# Altium PCB PCB1.PcbDoc
Units mm, origin at the board's own origin, x right, y up, seen from the top; angles counter-clockwise.
Board outline 44 x 22 mm, 4 copper layers (Top Layer, Layer 1, Layer 2, Bottom Layer), stack 1.564 mm thick; 52 components, 43 nets, 175 pads, 173 vias.
Unrouted connection lines stored in the file: 9.
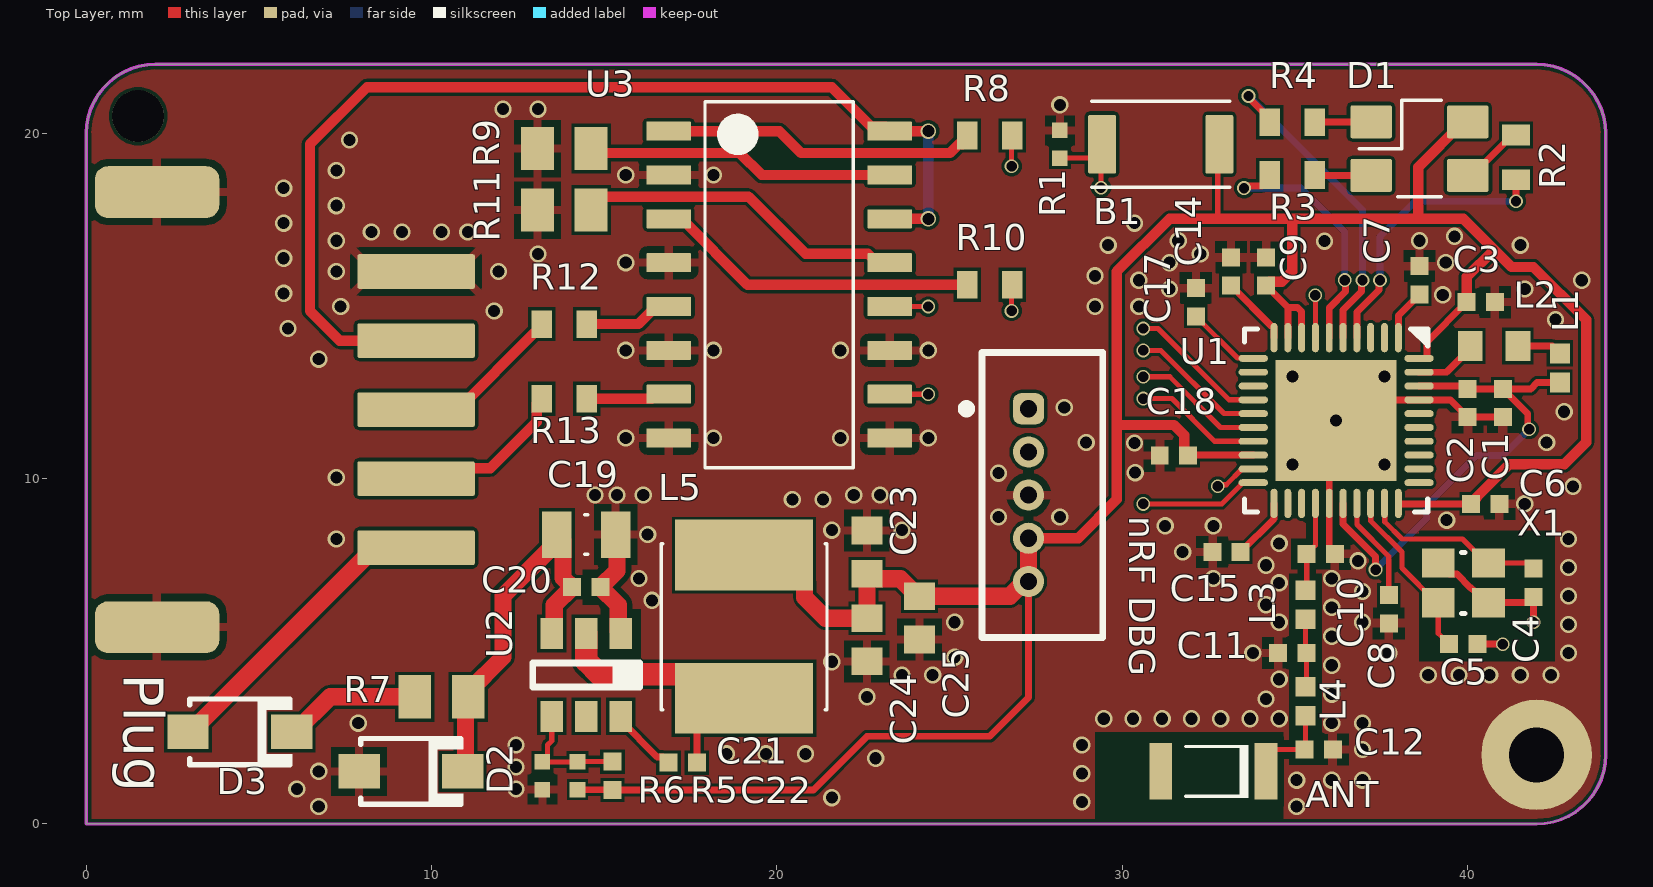
[diagram p0: Top Layer view]
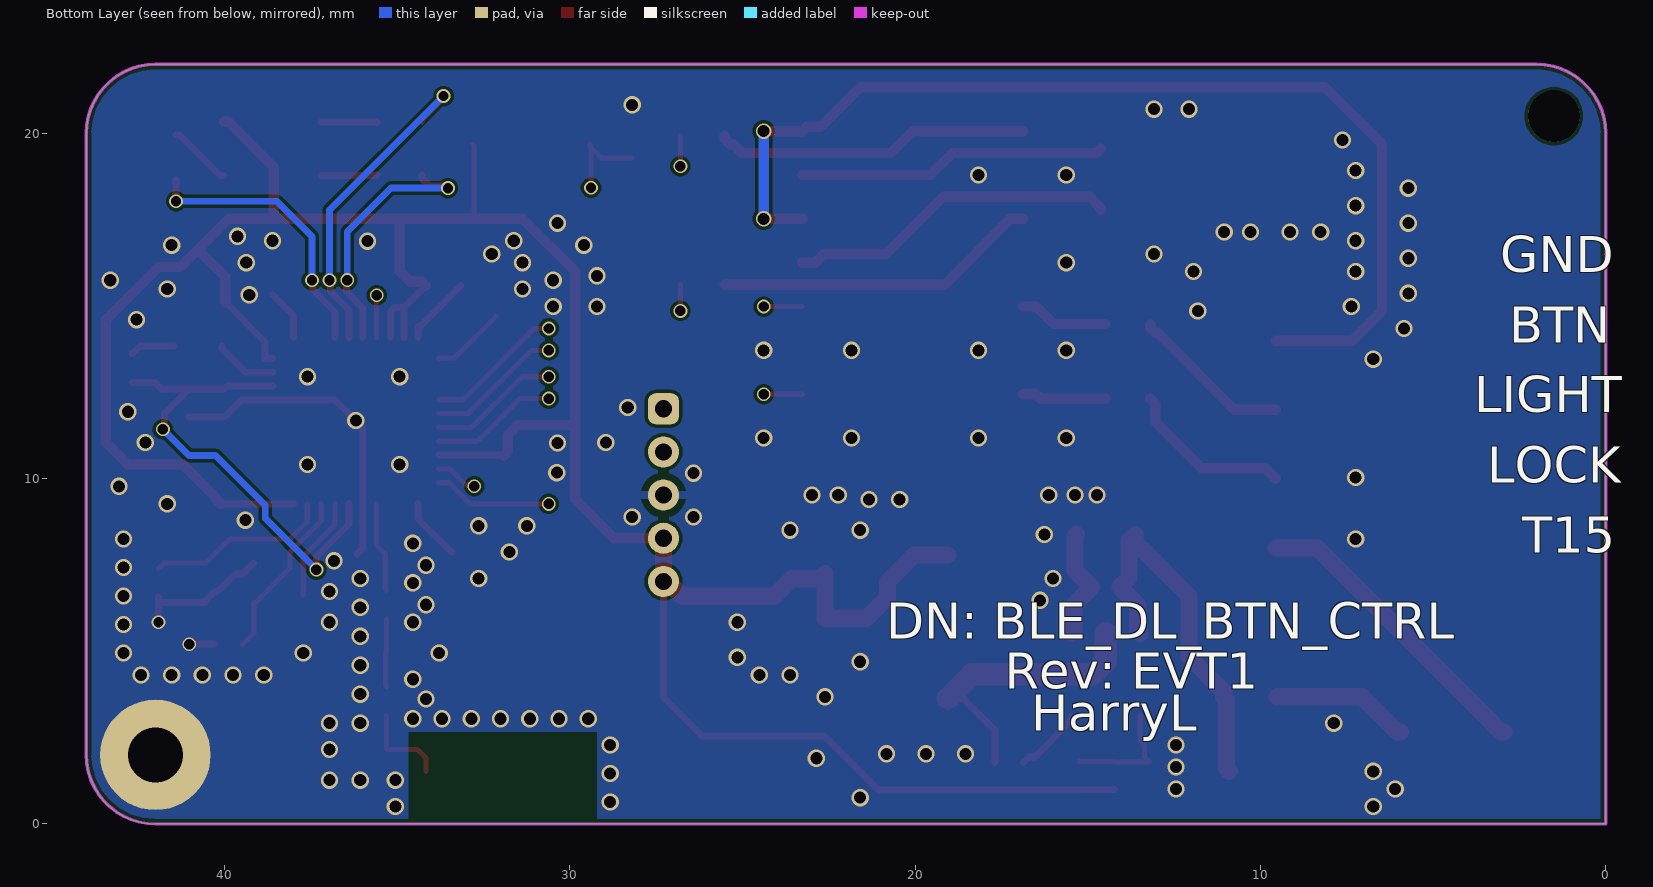
[diagram p1: Bottom Layer view, seen from below]
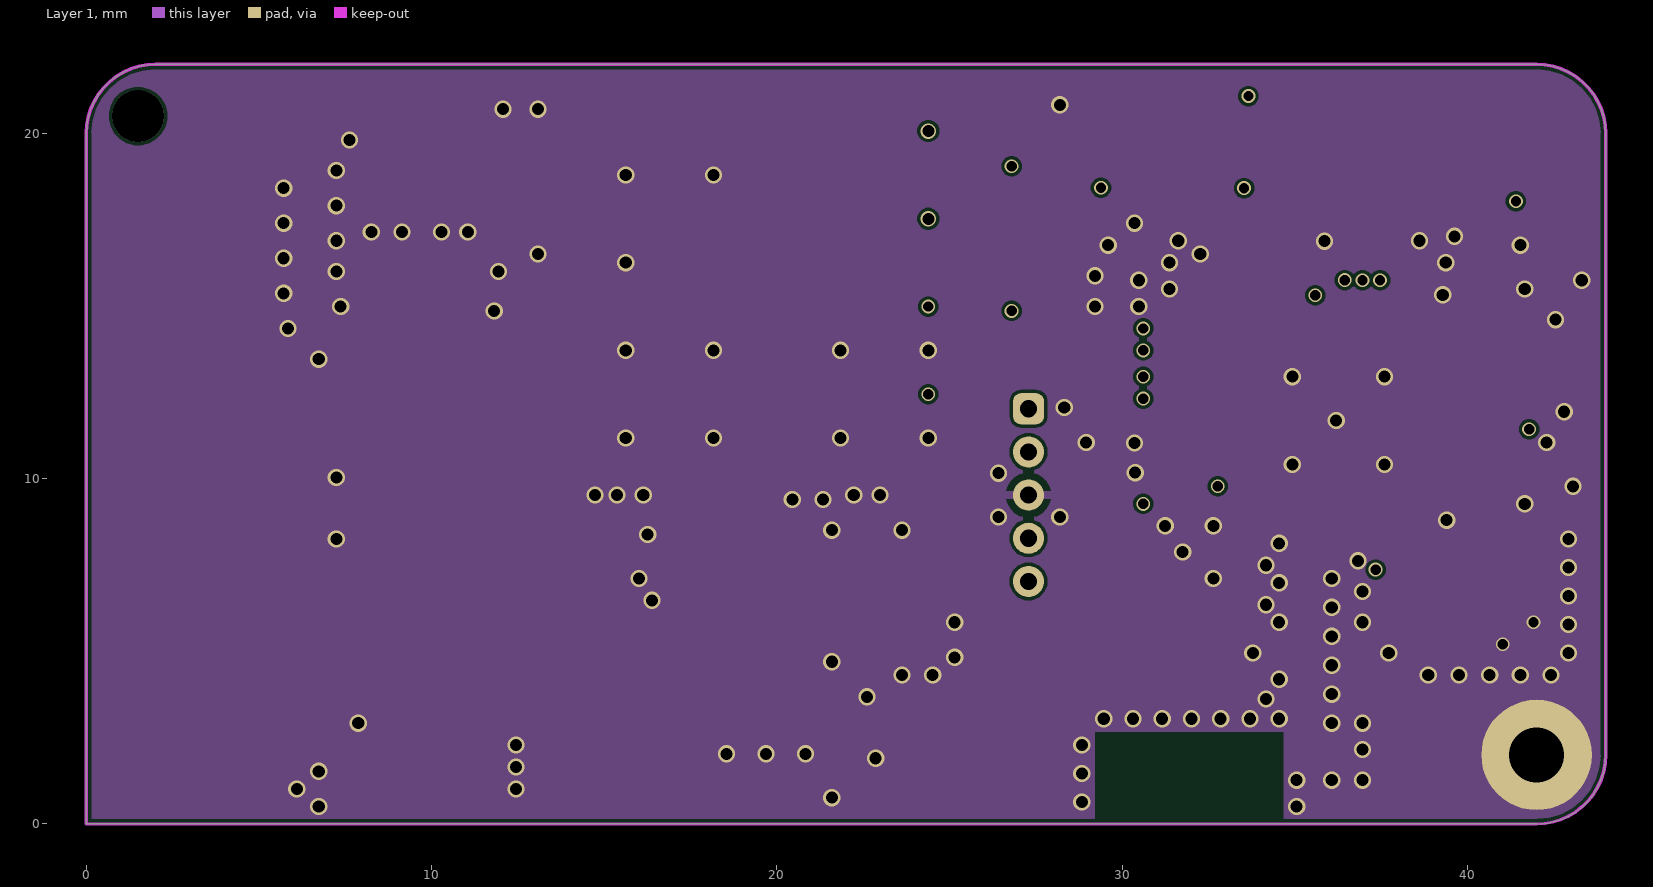
[diagram p2: Layer 1]
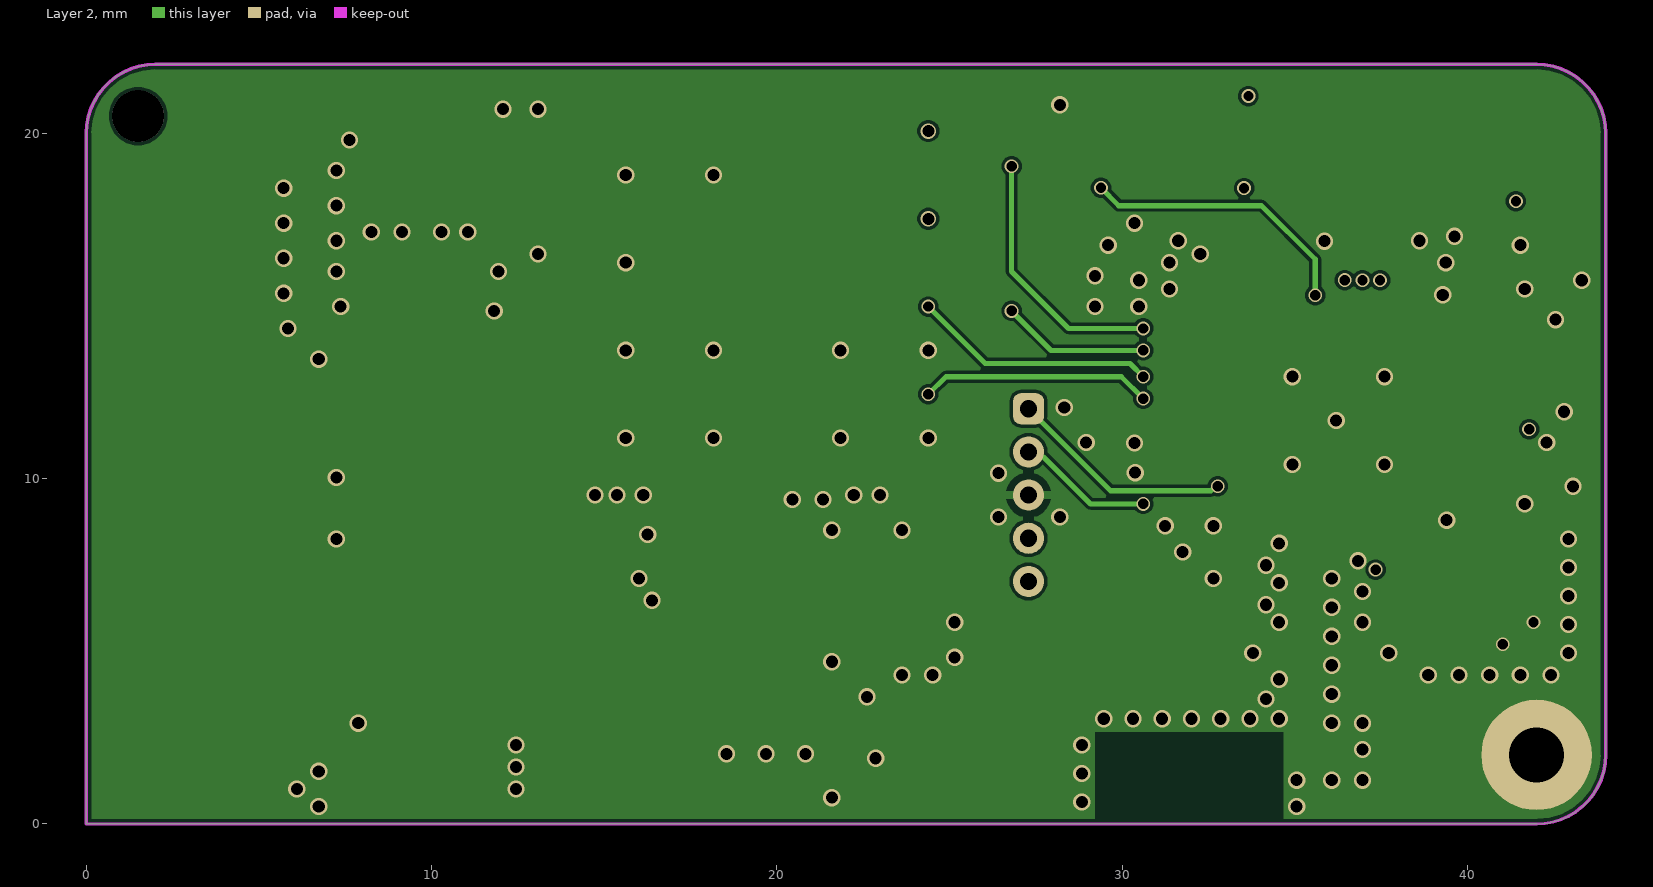
[diagram p3: Layer 2]
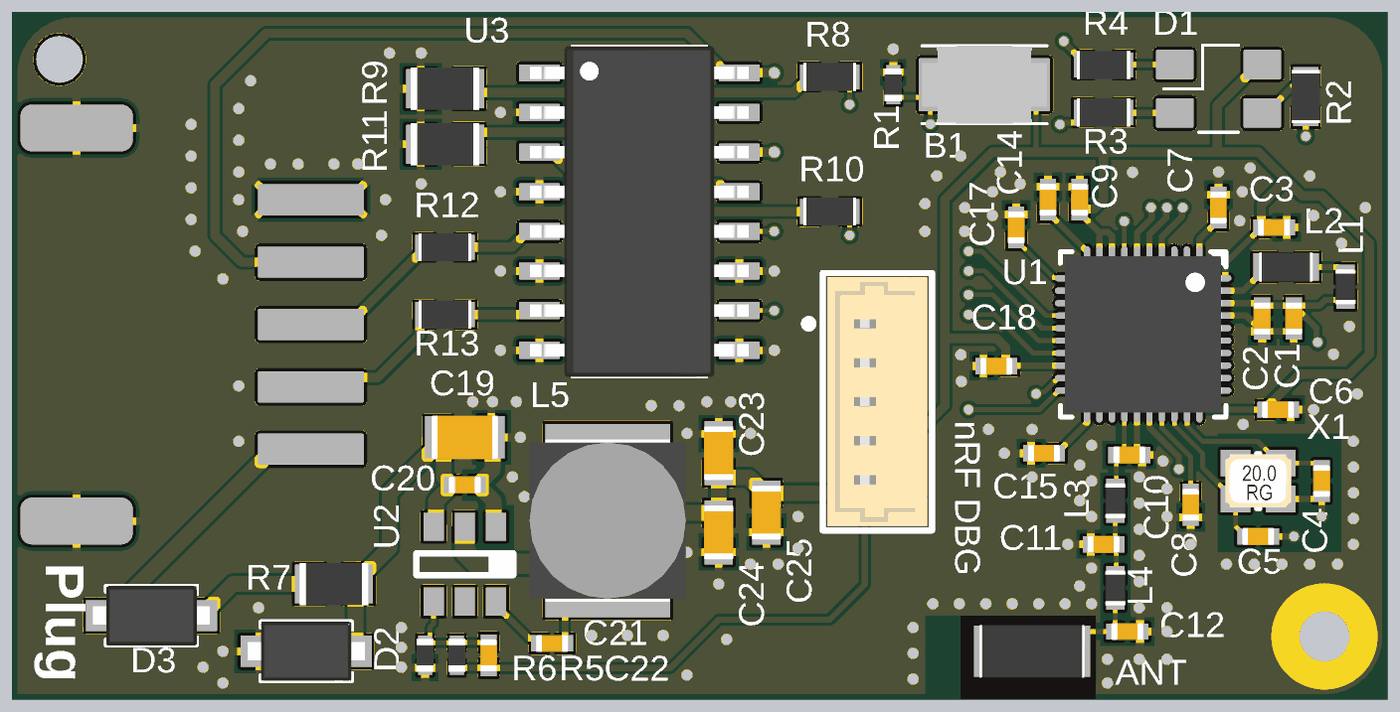
[diagram p4: 3D render of the assembled board from above, using the file's embedded part models]

## Layer stack, top to bottom
Top Solder: solder mask 0.0102, Solder Resist, Dk 3.5
Top Layer: signal copper 0.035
Dielectric 2: prepreg 0.0994, PP-006, Dk 4.1
Layer 1: signal copper 0.0152
Dielectric 1: dielectric 1.265, FR-4, Dk 4.8
Layer 2: signal copper 0.0152
Dielectric 3: prepreg 0.0994, PP-006, Dk 4.1
Bottom Layer: signal copper 0.035
Bottom Solder: solder mask 0.0102, Solder Resist, Dk 3.5

## Board outline
0,0 0,20 cw(c2,20) 2,22 42,22 cw(c42,20) 44,20 44,2 cw(c42,2) 42,0

## Design rules (kind name [scope] priority, off if disabled: settings)
Clearance Clearance_GND_Poly [InNet('GND') vs InPolygon] p1: gap=0.15 ignorepadtopadclearanceinfootprint=FALSE
Clearance Clearance_ANT [InNetClass('NC_ANT')] p2: gap=0.2 ignorepadtopadclearanceinfootprint=FALSE
Clearance [All] p3: gap=0.09 ignorepadtopadclearanceinfootprint=FALSE
MinimumSolderMaskSliver [All] p1: minsoldermaskwidth=0.05
PolygonConnect PolygonConnect_Via [isvia] p1: connectstyle=Direct reliefconductorwidth=0.254 reliefentries=4 polygonreliefangle="90 Angle" airgapwidth=0.254
PolygonConnect [All] p2: connectstyle=Relief reliefconductorwidth=0.25 reliefentries=4 polygonreliefangle="90 Angle" airgapwidth=0.2
RoutingVias [All] p1: holewidth=0.3 width=0.4 viastyle="Through Hole" minholewidth=0.3 minwidth=0.4 maxholewidth=100 maxwidth=100
SilkToSilkClearance [All] p1: silktosilkclearance=0.05
SilkToSolderMaskClearance [IsPad] p1: minsilkscreentomaskgap=0.05 clearancetoexposedcopper=TRUE
SolderMaskExpansion SolderMaskExpansion_Via [IsVia] p1: expansion=0.102 istentingtop=TRUE
SolderMaskExpansion [All] p2: expansion=0.102 istentingtop=FALSE
SupplyNets "Schematic Supply Nets_2" [InNet('GND')] p1: voltage=0.000
SupplyNets "Schematic Supply Nets_1" [InNet('3V3')] p2: voltage=0.000
SupplyNets "Schematic Supply Nets" [InNet('VCC')] p3: voltage=0.000
Width Width_ANT [InNetClass('NC_ANT')] p1: maxlimit=0.148 minlimit=0.111 preferedwidth=0.148 toplayer_minwidth=0.148 midlayer1_maxwidth=0.111 midlayer1_prefwidth=0.111 midlayer2_maxwidth=0.111 midlayer2_prefwidth=0.111 bottomlayer_minwidth=0.148 impedanceprofiledriven=TRUE impedanceprofileid={02682A00-AA90-4192-88A3-5017D469074D} impedanceprofilevalue=50.000000 minimp=50.000000 maximp=50.000000 favimp=50.000000
Width [All] p2: maxlimit=100 minlimit=0.09 preferedwidth=0.1
27 further rules are at their usual default settings.

## Classes and differential pairs
net class NC_ANT: NetA1_1 NetA1_2 NetC11_2 nRF_ANT
component class DCDC: C19 C20 C21 C22 C23 C24 C25 L5 R5 R6 U2
component class Connector: D2 D3 Plug R7 R8 R9 R10 R11 R12 R13 U3
component class BLE: ANT B1 C1 C2 C3 C4 C5 C6 C7 C8 C9 C10 C11 C12 C14 C15 C17 C18 D1 L1 L2 L3 L4 "nRF DBG" R1 R2 R3 R4 U1 X1

## Components (designator, comment, footprint, x,y, rotation, side; value= is the part's Value field where it differs from the comment)
ANT "RFANT3216120A1T" INDC3216X13L 32.639,1.524 r180 top (schematic designator A1)
B1 "B3U-1000P" "2.5*4 BTN" 31.115,19.685 r180 top
C1 "CL05A105KA5NQNC" CAPC1005X55X25LL05T05 41.021,12.192 r90 top value=1uF
C2 "CL05B473KB5VPNC" CAPC1005X55X25LL05T05 40.005,12.192 r90 top value=47nF
C3 "CL05A105KA5NQNC" CAPC1005X55X25LL05T05 40.386,15.113 r180 top value=1uF
C4 "CL05C080DB5NNNC" CAPC1005X55X25LL05T05 41.91,6.985 r270 top value=8pF
C5 "CL05C080DB5NNNC" CAPC1005X55X25LL05T05 39.878,5.207 r180 top value=8pF
C6 "CL05B104KB5NNNC" CAPC1005X55X25LL05T05 40.513,9.271 r0 top value=100nF
C7 "CL05B104KB5NNNC" CAPC1005X55X25LL05T05 38.608,15.748 r90 top value=100nF
C8 "CL05C101JB5NNNC" CAPC1005X55X25LL05T05 37.719,6.223 r270 top value=100pF
C9 "CL05A475MQ5NRNC" CAPC1005X55X25LL05T05 34.163,16.002 r90 top value=4.7uF
C10 "CL05C010CB5NNNC" CAPC1005X55X25LL05T05 35.752,7.817 r180 top value=1pF
C11 "CL05C1R2BB5NNNC" CAPC1005X55X25LL05T05 34.925,4.953 r0 top value=1.2pF
C12 "0402 Capacitor" CAPC1005X55X25LL05T05 35.687,2.159 r180 top value=TBD
C14 "CL05A475MQ5NRNC" CAPC1005X55X25LL05T05 33.147,16.002 r270 top value=4.7uF
C15 "CL05B821KB5NNNC" CAPC1005X55X25LL05T05 33.02,7.874 r0 top value=820pF
C17 "CL05A475MQ5NRNC" CAPC1005X55X25LL05T05 32.131,15.113 r270 top value=4.7uF
C18 "CL05A475MQ5NRNC" CAPC1005X55X25LL05T05 31.496,10.668 r180 top value=4.7uF
C19 "CL21A226MAQNNNE" CAPC2012X14L 14.478,8.382 r180 top value=22uF
C20 "CL05B104KB5NNNC" CAPC1005X55X25LL05T05 14.478,6.858 r180 top value=100nF
C21 "CL05B104KB5NNNC" CAPC1005X55X25LL05T05 17.272,1.778 r180 top value=100nF
C22 "CL05C820JB5NNNC" CAPC1005X55X25LL05T05 15.24,1.397 r270 top value=82pF
C23 "CL10A226MP8NUNE" CAPC1608X87X35LL15T15 22.606,7.874 r270 top value=22uF
C24 "CL10A226MP8NUNE" CAPC1608X87X35LL15T15 22.606,5.334 r90 top value=22uF
C25 "CL10B104JB8NNNC" CAPC1608X87X35LL15T15 24.13,5.969 r90 top value=100nF
D1 "3528 CA RGB LED" "3528 CA RGB LED" 38.608,19.558 r180 top
D2 "SMFJ24A" SOD-123FL 9.398,1.524 r0 top
D3 "DSK24" SOD-123FL 4.445,2.667 r0 top
L1 "SDCL1005C15NJTDF" INDC1005X06L 42.672,13.208 r270 top value=15nH
L2 "LQM18FN100M00D" INDC1608X10L 40.767,13.843 r0 top value=10uH
L3 "SDCL1005C4N7STDF" INDC1005X06L 35.306,6.35 r270 top value=4.7nH
L4 "SDCL1005C2N2STDF" INDC1005X06L 35.306,3.556 r270 top value=2.2nH
L5 "SWPA5040S100MT" INDP5050X42L 19.05,5.715 r90 top value=10uH
"nRF DBG" "653005114822" 653005114822 27.686,9.525 r90 top
Plug "HY2.0-5P-SMD-R" HY2.0-5P-SMD-R 5.8,12 r90 top (schematic designator P1)
R1 "1K 0402" RESC1005X40X25LL05T05 28.194,19.685 r270 top value=1K
R2 "1K 0603" RESC1608X55X25LL10T15 41.402,19.304 r270 top value=1K
R3 "1K 0603" RESC1608X55X25LL10T15 34.925,18.796 r180 top value=1K
R4 "1K 0603" RESC1608X55X25LL10T15 34.925,20.32 r0 top value=1K
R5 "100K 0402" RESC1005X40X25LL05T05 14.224,1.397 r270 top value=100K
R6 "22K 0402" RESC1005X40X25LL05T05 13.208,1.397 r90 top value=22K
R7 "0805 Chip Resistor" RESC2013X70X40LL20T20 10.287,3.683 r0 top value=TBD
R8 "1K 0603" RESC1608X55X25LL10T15 26.162,19.939 r180 top value=1K
R9 "0R 0805" RESC2013X70X40LL20T20 13.843,19.558 r180 top value=0R
R10 "1K 0603" RESC1608X55X25LL10T15 26.162,15.621 r180 top value=1K
R11 "180R 0805" RESC2013X70X40LL20T20 13.843,17.78 r180 top value=180R
R12 "1K 0603" RESC1608X55X25LL10T15 13.843,14.478 r0 top value=1K
R13 "1K 0603" RESC1608X55X25LL10T15 13.843,12.319 r0 top value=1K
U1 "nRF52833_QDAA" QFN40P500X500X50_HS-41N 36.195,11.684 r270 top
U2 "TPS54302DDCR" TSOP-6_L 14.478,4.318 r270 top
U3 "TLP291-4(GB)" SOP127P700X210-16L 20.066,15.621 r0 top
X1 "X201632MKB4SI" XTAL_2016 39.878,6.985 r0 top

## Footprints (in the part's own frame and the unit in brackets; to place one, negate y for a bottom-side part, rotate by r counter-clockwise, add the part's x,y. Pads: shape width x height; smd on the part's side, far side on the other; paste and mask are expansions set on the pad)
"2.5*4 BTN" [mm]
  rrect10% 0.8x1.7 smd: 1(-1.7,0) 2(1.7,0)
  silkscreen extent -2,-1.25 2,1.25, body extent -2,-1.25 2,1.25, height 1.6
"3528 CA RGB LED" [mm]
  rrect10% 1.2x0.95 smd: 1(1.4,-0.775) 2(-1.4,-0.775) 3(-1.4,0.775) 4(1.4,0.775)
  silkscreen extent -0.64,-1.4 1.75,1.4, body extent -1.75,-1.4 1.75,1.4, height 1.9
653005114822 [mm] "1.25mm Male Vertical Shrouded Header, 5p"
  rrect50% 0.9x0.9 hole 0.5: 1(2.5,0.4)
  round 0.9 hole 0.5: 2(1.25,0.4) 3(0,0.4) 4(-1.25,0.4) 5(-2.5,0.4)
  silkscreen extent -4.13,-1.75 4.13,2.32, body extent -4,-1.6 4,1.6, height 4.23
CAPC1005X55X25LL05T05 [mm] "Chip Capacitor, 2-Leads, Body 1.05x0.55mm, IPC High Density"
  rect 0.52x0.52 smd: 1(-0.41,0) 2(0.41,0)
  body extent -0.53,-0.28 0.53,0.28, height 0.55
CAPC1608X87X35LL15T15 [mm] "Chip Capacitor, 2-Leads, Body 1.75x0.95mm, IPC High Density"
  rect 0.8x0.9 smd: 1(-0.625,0) 2(0.625,0)
  body extent -0.87,-0.48 0.87,0.48, height 0.87
CAPC2012X14L [mm] "Chip Capacitor, 2-Leads, Body 2.00x1.25mm, IPC High Density"
  rect 0.85x1.35 smd: 1(-0.85,0) 2(0.85,0)
  silkscreen extent -0.05,-0.58 0.05,0.58, body extent -1.07,-0.7 1.07,0.7, height 1.4
HY2.0-5P-SMD-R [mm] "HY2.0 5P SMD Right angle"
  rrect10% 1x3.4 smd: 1(-4,-3.75) 2(-2,-3.75) 3(0,-3.75) 4(2,-3.75) 5(4,-3.75)
  rrect50% 1.5x3.6 smd: S(-6.3,3.75) S(6.3,3.75)
  body extent -7,-4.62 7,4.62, height 5.45
INDC1005X06L [mm] "Chip Inductor, 2-Leads, Body 1.00x0.50mm, IPC High Density"
  rect 0.57x0.58 smd: 1(-0.42,0) 2(0.42,0)
  body extent -0.58,-0.33 0.58,0.33, height 0.65
INDC1608X10L [mm] "Chip Inductor, 2-Leads, Body 1.60x0.80mm, IPC High Density"
  rect 0.72x0.88 smd: 1(-0.69,0) 2(0.69,0)
  body extent -0.87,-0.48 0.87,0.48, height 0.95
INDC3216X13L [mm] "Chip Inductor, 2-Leads, Body 3.20x1.60mm, IPC High Density"
  rect 0.66x1.64 smd: 1(-1.525,0) 2(1.525,0)
  silkscreen extent -1.02,-0.76 0.8,0.76, body extent -1.7,-0.85 1.7,0.85, height 1.3
INDP5050X42L [mm] "Precision Wire Wound Inductor, 2-Leads, Body 5.00x5.00mm, IPC High Density"
  rect 2.05x4 smd: 1(-2.075,0) 2(2.075,0)
  silkscreen extent -2.4,-2.4 2.4,2.4, body extent -2.6,-2.5 2.6,2.5, height 4.3
QFN40P500X500X50_HS-41N [mm] "QFN, 40-Leads, Body 5.00x5.00mm, Pitch 0.40mm, Thermal Pad 3.60x3.60mm, IPC Medium Density"
  oval 0.85x0.2 smd: 1(-2.4,1.8) 2(-2.4,1.4) 3(-2.4,1) 4(-2.4,0.6) 5(-2.4,0.2) 6(-2.4,-0.2) 7(-2.4,-0.6) 8(-2.4,-1) 9(-2.4,-1.4) 10(-2.4,-1.8) 21(2.4,-1.8) 22(2.4,-1.4) 23(2.4,-1) 24(2.4,-0.6) 25(2.4,-0.2) 26(2.4,0.2) 27(2.4,0.6) 28(2.4,1) 29(2.4,1.4) 30(2.4,1.8)
  oval 0.2x0.85 smd: 11(-1.8,-2.4) 12(-1.4,-2.4) 13(-1,-2.4) 14(-0.6,-2.4) 15(-0.2,-2.4) 16(0.2,-2.4) 17(0.6,-2.4) 18(1,-2.4) 19(1.4,-2.4) 20(1.8,-2.4) 31(1.8,2.4) 32(1.4,2.4) 33(1,2.4) 34(0.6,2.4) 35(0.2,2.4) 36(-0.2,2.4) 37(-0.6,2.4) 38(-1,2.4) 39(-1.4,2.4) 40(-1.8,2.4)
  rect 3.5x3.5 smd: 41(0,0)
  silkscreen extent -2.65,-2.65 2.65,2.65, body extent -2.5,-2.5 2.5,2.5, height 0.5
RESC1005X40X25LL05T05 [mm] "Chip Resistor, 2-Leads, Body 1.05x0.55mm, IPC High Density"
  rect 0.45x0.45 smd: 1(-0.4,0) 2(0.4,0)
  body extent -0.53,-0.28 0.53,0.28, height 0.4
RESC1608X55X25LL10T15 [mm] "Chip Resistor, 2-Leads, Body 1.70x0.90mm, IPC High Density"
  rect 0.6x0.8 smd: 1(-0.65,0) 2(0.65,0)
  body extent -0.85,-0.45 0.85,0.45, height 0.55
RESC2013X70X40LL20T20 [mm] "Chip Resistor, 2-Leads, Body 2.2x1.35mm, IPC High Density"
  rect 0.95x1.25 smd: 1(-0.775,0) 2(0.775,0)
  body extent -1.1,-0.67 1.1,0.67, height 0.7
SOD-123FL [mm]
  rect 1.2x1 smd: 1(-1.5,0) 2(1.5,0)
  silkscreen extent -1.45,-0.95 1.52,0.95, body extent -1.88,-0.95 1.88,0.95, height 1.1
SOP127P700X210-16L [mm] "SOP, 16-Leads, Body 10.35x4.60mm, Pitch 1.27mm, IPC High Density"
  rrect10% 1.3x0.55 smd: 1(-3.2,4.445) 2(-3.2,3.175) 3(-3.2,1.905) 4(-3.2,0.635) 5(-3.2,-0.635) 6(-3.2,-1.905) 7(-3.2,-3.175) 8(-3.2,-4.445) 9(3.2,-4.445) 10(3.2,-3.175) 11(3.2,-1.905) 12(3.2,-0.635) 13(3.2,0.635) 14(3.2,1.905) 15(3.2,3.175) 16(3.2,4.445)
  silkscreen extent -2.15,-5.3 2.15,5.3, body extent -3.5,-5.3 3.5,5.3, height 2.1
TSOP-6_L [mm] "SOT23, 6-Leads, Body 3x1.5mm, Pitch 1mm, Lead Span 2.7mm, IPC High Density"
  rect 0.9x0.65 smd: 1(-1.2,1) 2(-1.2,0) 3(-1.2,-1) 4(1.2,-1) 5(1.2,0) 6(1.2,1)
  silkscreen extent -0.35,-1.55 0.38,1.55, body extent -0.9,-1.55 0.9,1.55, height 1.1
XTAL_2016 [mm]
  rect 0.95x0.85 smd: 1(-0.725,-0.575) 2(0.725,-0.575) 3(0.725,0.575) 4(-0.725,0.575)
  silkscreen extent -0.05,-0.89 0.05,0.88, body extent -1.05,-0.85 1.05,0.85, height 0.56

## Part data
ANT: "2450Mhz 50Mhz Ceramic Antenna", Pins=2, Type=Antenna
B1: "2.5x4 Ultra-small Tactile Switch", Pins=2, Type=Button
C1 C3: "Non-Polarized Capacitor Symbol", Capacitor Type=Ceramic, Case/Size Code=0402, Tolerance=10%, Voltage Rating=25V, Type=X5R
C2 C6 C7 C15 C20 C21: "Non-Polarized Capacitor Symbol", Capacitor Type=Ceramic, Case/Size Code=0402, Tolerance=10%, Voltage Rating=50V, Type=X7R
C4 C5: "Non-Polarized Capacitor Symbol", Capacitor Type=Ceramic, Case/Size Code=0402, Tolerance=0.5pF, Voltage Rating=50V, Type=C0G
C8 C22: "Non-Polarized Capacitor Symbol", Capacitor Type=Ceramic, Case/Size Code=0402, Tolerance=5%, Voltage Rating=50V, Type=C0G
C9 C14 C17 C18: "Non-Polarized Capacitor Symbol", Capacitor Type=Ceramic, Case/Size Code=0402, Tolerance=20%, Voltage Rating=6.3V, Type=X5R
C10: "Non-Polarized Capacitor Symbol", Capacitor Type=Ceramic, Case/Size Code=0402, Tolerance=0.25pF, Voltage Rating=50V, Type=C0G
C11: "Non-Polarized Capacitor Symbol", Capacitor Type=Ceramic, Case/Size Code=0402, Tolerance=0.1pF, Voltage Rating=50V, Type=C0G
C12: "Non-Polarized Capacitor Symbol", Capacitor Type=Ceramic, Case/Size Code=0402, Tolerance=TBD, Type=TBD, Voltage Rating=TBD
C19: "Non-Polarized Capacitor Symbol", Capacitor Type=Ceramic, Case/Size Code=0805, Tolerance=20%, Voltage Rating=25V, Type=X5R
C23 C24: "Non-Polarized Capacitor Symbol", Capacitor Type=Ceramic, Case/Size Code=0603, Tolerance=20%, Voltage Rating=10V, Type=X5R
C25: "Non-Polarized Capacitor Symbol", Capacitor Type=Ceramic, Case/Size Code=0603, Tolerance=5%, Voltage Rating=50V, Type=X7R
D1: "3528 Common Anode RGB LED", Package=3528, Pin=4, Type=LED
D2: "TVS Diode", Package=SOD-123FL, Pins=2
D3: "40V 2A Schottky barrier diode", Package=SOD-123FL, Pin=2, Type=Schottky
L1 L4: "HF inductor", Case/Size Code=0402, Pins=2
L2: "Chip Coil inductor 50mA 20% 10uH", Case/Size Code=0603, Pins=2
L3: "4.7nH ±0.3nH 300mA HF", Case/Size Code=0402, Pins=2
L5: Case/Size Code=5040, Pins=2
"nRF DBG": "WR-WTB THT Male Vertical Shrouded Header, pitch 1.25mm, 5pins", Contact Resistance=20mOhm, Manufacturer="Wurth Elektronik", Operating Temperature Max=85°C, Operating Temperature Min=-40°C, Rated Current=1A, Withstanding Voltage=250VAC, Working Voltage=125VAC, Category="Wire-to-Board Connectors", ComponentLink1Description="Website Link", ComponentLink1URL=https://www.we-online.com/redexpert/article/653005114822?ad, ComponentLink2Description="Datasheet Link", ComponentLink2URL=https://www.we-online.com/redexpert/spec/653005114822?ad, Gender=Male, Height=4.2mm, Length=8mm, Manufacturer Part Number=653005114822, Match Code=WR-WTB, Mount="Through Hole", Number of Pins=5, Number of Rows=1, Orientation=Vertical, Packaging=Tube, Pitch=1.25mm, Width=3.2mm
Plug: "HY2.0 5P SMD Right angle", Pins=5, Type=HY2.0
R1 R6: "0402 Chip Resistor", Case/Size Code=0402, Pins=2
R2 R3 R4 R8 R10 R12 R13: "0603 Chip Resistor", Case/Size Code=0603, Pins=2
R5: "Chip Resistor, 100K Ohm, +/- 1%, 0.063 W, -55 to 155 degC, 0402 (1005 Metric)", Case/Size Code=0402, Pins=2
R7: "0805 Universal Chip Resistor", Case/Size Code=0805, Pins=2
R9 R11: "0805 Chip Resistor", Case/Size Code=0805, Pins=2
U1: "Multi-protocol Bluetooth Low Energy, IEEE 802.15.4, ANT and 2.4GHz proprietary system-on-chip", Package=QFN40
U2: "4.5-V to 28-V Input, 3-A Output, EMI-Friendly Synchronous Step-Down Converter", Package=TSOP-6
U3: "Photocouplers GaAs Infrared LED & Photo Transistor CTR 100", Package=SO-16
X1: "32MHz ±10ppm 8pF", Frequency=32Mhz, Frequency Tolerance=10ppm, Load Capacitance=8pF, Pins=4

## Free pads (board coordinates)
  round 3.2 hole 1.6: S(42,2)
  round 1.5 hole 1.5 unplated: S1(1.5,20.5)

## Via types
v1: diameter 0.5, hole 0.35, Top Layer to Bottom Layer, tented both sides, 149 vias
v2: diameter 0.4, hole 0.3, Top Layer to Bottom Layer, tented both sides, 22 vias
v3: diameter 0.45, hole 0.35, Top Layer to Bottom Layer, tented both sides, 2 vias

## Nets (pads, with @x,y where several pads share a name; then routed paths per layer and width w, separated by ;. In a path a pad name is that pad's centre, name@x,y a point inside that pad or via, vN(x,y) a via of type N, cw(c..) or ccw(c..) an arc to the next point about the centre after c; other vN are vias at no path point)
3V3: "nRF DBG.4" "nRF DBG.5" B1.1 C3.2 C6.1 C9.1 C18.1 C22.2 C23.2 C24.2 C25.2 D1.2 L5.2 R5.2 U1.8 U1.9 U1.18 U1.30 U1.40 | length 84.5
  Top Layer w0.15: 32.766,17.526 32.766,19.636 B1.1
  Top Layer w0.2: R5.2 14.229,0.992 15.235,0.992 C22.2 21.053,0.987 22.606,2.54 26.162,2.54 27.286,3.664 27.286,7.025 ; C18.1 31.922,10.684 U1.18 ; C9.1 34.795,14.96 ; U1.9 34.795,14.96 ; U1.8 35.195,14.843 35.078,14.96 34.795,14.96 ; U1.30 37.995,9.271 C6.1 ; U1.40 38.82,13.484 38.82,13.957 C3.2
  Top Layer w0.3: 27.286,8.275 28.722,8.275 29.845,9.398 29.845,11.557 ; C18.1 31.796,10.778 31.796,11.257 31.496,11.557 29.845,11.557 ; C9.1 34.273,15.702 34.625,15.702 34.925,16.002 34.925,17.526 ; C3.2 39.976,15.846 40.767,16.637 ; D1.2 39.883,20.333 38.57,19.02 38.57,17.526 ; C6.1 40.259,9.427 40.259,9.466 41.207,10.414 42.799,10.414 43.434,11.049 43.434,14.605 41.91,16.129 41.275,16.129 40.767,16.637 ; 29.845,11.557 29.845,16.002 31.369,17.526 32.766,17.526 34.925,17.526 ; 34.925,17.526 38.57,17.526 ; 38.57,17.526 39.878,17.526 40.767,16.637
  Top Layer w0.5: L5.2 20.025,7.79 20.8,7.015 20.8,6.565 21.406,5.959 C24.2 C23.2 22.756,7.099 23.575,7.099 24.08,6.594 C25.2 26.747,6.594 27.178,7.025 27.286,7.025 27.286,8.275
BCM_LIGHT_IND: Plug.3 R12.1 | length 4.7
  Top Layer w0.3: Plug.3 10.75,12 12.978,14.228 13.043,14.228 13.193,14.378 R12.1
BCM_LOCK_BTN: Plug.4 U3.14 U3.16 | length 31
  Top Layer w0.3: Plug.4 7.336,14 6.477,14.859 6.477,19.685 8.128,21.336 21.59,21.336 22.735,20.191 23.141,20.191 U3.16 v3(24.384,20.066) ; U3.14 v3(24.384,17.526)
  Bottom Layer w0.3: v3(24.384,17.526) v3(24.384,20.066)
BCM_LOCK_IND: Plug.2 R13.1 | length 4.9
  Top Layer w0.3: Plug.2 9.853,10.303 11.7,10.303 13.043,11.646 13.043,12.169 R13.1
BLE_LIGHT_IND: U1.16 U3.12 | length 12
  Top Layer w0.15: U3.12 v2(24.384,14.986) ; v2(30.607,12.954) 31.377,12.954 32.847,11.484 U1.16
  Layer 2 w0.15: v2(24.384,14.986) 26.035,13.335 30.226,13.335 v2(30.607,12.954)
BLE_LOCK_BTN: R8.1 U1.14 | length 12.5
  Top Layer w0.15: v2(26.797,19.05) 26.797,19.924 R8.1 ; v2(30.607,14.351) 30.612,14.346 31.032,14.346 33.094,12.284 U1.14
  Layer 2 w0.15: v2(26.797,19.05) 26.797,16.002 28.448,14.351 v2(30.607,14.351)
BLE_LOCK_IND: U1.17 U3.10 | length 11.5
  Top Layer w0.15: U3.10 v2(24.384,12.446) ; v2(30.607,12.319) 31.441,12.319 32.676,11.084 U1.17
  Layer 2 w0.15: v2(24.384,12.446) 24.892,12.954 29.972,12.954 v2(30.607,12.319)
BLE_UNLOCK_BTN: R10.1 U1.15 | length 9
  Top Layer w0.15: v2(26.797,14.859) 26.797,15.606 R10.1 ; v2(30.607,13.716) 31.115,13.716 32.947,11.884 U1.15
  Layer 2 w0.15: v2(26.797,14.859) 27.94,13.716 v2(30.607,13.716)
BTN: B1.2 R1.2 U1.7 | length 12
  Top Layer w0.15: R1.2 29.09,19.285 B1.2@29.385,19.58 ; v2(29.385,18.424) B1.2@29.385,19.58 ; v2(35.59,15.31) 35.595,15.305 U1.7 ; B1.2@29.385,19.58 29.385,19.655 B1.2 29.415,19.61 B1.2@29.385,19.58
  Layer 2 w0.15: v2(29.385,18.424) 29.901,17.907 34.036,17.907 35.59,16.353 v2(35.59,15.31)
DEC4_6: C1.2 C2.2 L1.2 U1.26 U1.38 | length 14.3
  Top Layer w0.2: U1.26 36.395,8.69 37.338,7.747 v2(37.338,7.366) ; U1.38 39.923,12.684 C2.2 C1.2 ; v2(41.783,11.43) 41.745,11.468 41.745,11.878 C1.2 ; L1.2 42.017,12.788 41.831,12.602 C1.2
  Bottom Layer w0.2: v2(37.338,7.366) 38.818,8.846 38.818,9.227 40.259,10.668 41.021,10.668 v2(41.783,11.43)
GND: "nRF DBG.3" C1.1 C2.1 C3.1 C4.2 C5.1 C6.2 C7.2 C8.2 C9.2 C10.1 C11.1 C12.1 C14.1 C15.1 C17.1 C18.2 C19.1 C20.1 C23.1 C24.1 C25.1 D2.1 pad.S Plug.5 Plug.S R1.1 R6.1 R9.2 R11.2 U1.25 U1.37 U1.41 U2.1 U3.2 U3.4 U3.6 U3.8 U3.9 U3.11 X1.2 X1.4 | length 17.4
  Top Layer w0.2: C10.1 35.995,7.984 U1.25 35.995,11.484 v1(36.195,11.684) 36.795,12.284 U1.37 39.503,12.284 C2.1 C1.1 ; X1.4 39.478,7.235 39.693,7.235 40.088,6.84 40.106,6.84 40.211,6.735 40.278,6.735 X1.2 ; C5.1 v2(41.021,5.207) ; X1.2@40.553,6.41 C4.2@41.91,6.41 ; v2(41.91,5.842) C4.2@41.91,6.41 ; C4.2 C4.2@41.91,6.41
  Top Layer w0.5: C19.1 15.367,8.343 15.367,7.337 C20.1 15.403,6.343 15.403,5.593 U2.1
  other v1: 6.731,0.508 35.052,0.508 28.829,0.635 21.59,0.762 6.096,1.016 12.446,1.016 35.052,1.27 36.068,1.27 36.957,1.27 28.829,1.46 6.731,1.524 12.446,1.651 22.86,1.905 18.542,2.032 19.685,2.032 20.828,2.032 36.957,2.159 12.446,2.286 28.829,2.286 7.874,2.921 36.068,2.921 36.957,2.921 29.464,3.048 30.311,3.048 31.157,3.048 32.004,3.048 32.851,3.048 33.697,3.048 34.544,3.048 34.163,3.619 22.606,3.683 36.068,3.759 34.544,4.191 23.622,4.318 24.511,4.318 38.862,4.318 39.751,4.318 40.64,4.318 41.529,4.318 42.418,4.318 36.068,4.597 21.59,4.699 25.146,4.826 33.782,4.953 37.719,4.953 42.926,4.953 36.068,5.436 42.926,5.779 25.146,5.842 34.544,5.842 36.957,5.842 36.068,6.274 34.163,6.35 16.383,6.477 42.926,6.604 36.957,6.731 34.544,6.985 16.002,7.112 32.639,7.112 36.068,7.112 42.926,7.429 34.163,7.493 36.83,7.62 31.75,7.874 34.544,8.128 7.239,8.255 42.926,8.255 16.256,8.382 21.59,8.509 23.622,8.509 31.242,8.636 32.639,8.636 39.396,8.798 26.416,8.89 28.194,8.89 41.656,9.271 20.447,9.398 21.336,9.398 14.732,9.525 15.367,9.525 16.129,9.525 22.225,9.525 22.987,9.525 43.053,9.779 7.239,10.033 26.416,10.16 30.375,10.175 34.925,10.414 37.592,10.414 30.357,11.031 28.956,11.049 42.291,11.049 15.621,11.176 18.161,11.176 21.844,11.176 24.384,11.176 42.799,11.938 28.321,12.065 34.925,12.954 37.592,12.954 6.731,13.462 15.621,13.716 18.161,13.716 21.844,13.716 24.384,13.716 5.842,14.351 42.545,14.605 11.811,14.859 7.366,14.986 29.21,14.986 30.48,14.986 39.282,15.325 5.715,15.367 31.369,15.494 41.656,15.494 30.48,15.748 43.307,15.748 29.21,15.875 7.239,16.002 11.938,16.002 15.621,16.256 31.369,16.256 39.37,16.256 5.715,16.383 13.081,16.51 32.258,16.51 29.591,16.764 41.529,16.764 7.239,16.891 31.623,16.891 35.854,16.878 38.608,16.891 39.624,17.018 8.255,17.145 9.144,17.145 10.287,17.145 11.049,17.145 5.715,17.399 30.353,17.399 7.239,17.907 5.715,18.415 15.621,18.796 18.161,18.796 7.239,18.923 7.62,19.812 12.065,20.701 13.081,20.701 28.194,20.828
LED_B: R2.2 U1.4 | length 8.2
  Top Layer w0.2: U1.4 36.795,14.824 37.438,15.467 37.438,15.721 v2(37.465,15.748) ; v2(41.402,18.034) R2.2
  Bottom Layer w0.2: v2(37.465,15.748) 37.465,17.018 38.481,18.034 v2(41.402,18.034)
LED_G: R3.2 U1.6 | length 7.7
  Top Layer w0.2: v2(33.528,18.415) 33.596,18.415 33.652,18.471 34.05,18.471 34.275,18.696 R3.2 ; U1.6 35.995,14.942 36.471,15.419 36.471,15.726 v2(36.445,15.752)
  Bottom Layer w0.2: v2(33.528,18.415) 35.179,18.415 36.445,17.149 v2(36.445,15.752)
LED_R: R4.1 U1.5 | length 9.6
  Top Layer w0.15: v2@33.655,21.04 v2(33.655,21.082) ; R4.1 R4.1@34.275,20.42
  Top Layer w0.2: v2@33.655,21.04 R4.1@34.275,20.42 ; U1.5 36.395,14.89 36.93,15.426 36.93,15.721 v2(36.957,15.748)
  Bottom Layer w0.2: v2(33.655,21.082) 36.957,17.78 v2(36.957,15.748)
NetA1_1: ANT.1 C12.2 L4.2 | length 2.6
  Top Layer w0.148: ANT.1 34.164,1.903 34.42,2.159 C12.2 35.306,2.188 L4.2
NetC4_1: C4.1 U1.29 X1.3 | length 5.4
  Top Layer w0.15: U1.29 37.605,9.274 37.605,8.75 38.1,8.255 39.858,8.255 40.553,7.56 X1.3 41.745,7.56 C4.1
NetC5_2: C5.2 U1.28 X1.1 | length 5
  Top Layer w0.15: U1.28 37.195,8.779 38.1,7.874 38.1,7.413 39.103,6.41 X1.1 39.153,5.522 C5.2
NetC7_1: C7.1 U1.1 | length 1.5
  Top Layer w0.2: U1.1 37.995,14.725 C7.1
NetC8_1: C8.1 U1.27 | length 3
  Top Layer w0.15: U1.27 36.795,8.671 37.719,7.747 C8.1
NetC11_2: C11.2 L3.2 L4.1 | length 2
  Top Layer w0.148: L4.1 35.335,4.005 C11.2 35.306,4.982 L3.2
NetC14_2: C14.2 U1.10 | length 2.1
  Top Layer w0.2: C14.2 34.33,14.409 34.395,14.409 U1.10
NetC15_2: C15.2 U1.21 | length 1.8
  Top Layer w0.2: C15.2 34.395,8.839 U1.21
NetC17_2: C17.2 U1.11 | length 2.2
  Top Layer w0.15: C17.2 33.34,13.494 33.785,13.494 U1.11
NetC21_1: C21.1 L5.1 U2.2 | length 8.5
  Top Layer w0.2: C21.1 17.682,2.715 18.607,3.64 L5.1
  Top Layer w0.65: U2.2 14.478,4.715 14.859,4.334 18.356,4.334 L5.1
NetC21_2: C21.2 U2.6 | length 2
  Top Layer w0.2: U2.6 15.478,2.993 16.533,1.938 16.702,1.938 C21.2
NetC22_1: C22.1 R5.1 R6.2 U2.4 | length 3.5
  Top Layer w0.15: U2.4 13.478,2.405 13.358,2.285 13.358,1.947 R6.2 R5.1 14.234,1.807 C22.1
NetD1_1: D1.1 R4.2 | length 1.6
  Top Layer w0.2: R4.2 35.588,20.333 D1.1
NetD1_3: D1.3 R2.1 | length 1.9
  Top Layer w0.2: D1.3 40.133,18.783 41.102,19.752 41.102,19.754 41.302,19.954 R2.1
NetD1_4: D1.4 R3.1 | length 1.6
  Top Layer w0.2: R3.1 35.588,18.783 D1.4
NetD3_1: D3.1 Plug.1 | length 8.8
  Top Layer w0.5: D3.1 3.045,2.667 3.295,2.917 3.295,2.945 8.35,8 Plug.1
NetD3_2: D3.2 R7.1 | length 4
  Top Layer w0.5: D3.2 6.045,2.667 7.061,3.683 R7.1
NetL1_1: L1.1 L2.2 | length 1.3
  Top Layer w0.2: L2.2 42.452,13.843 42.667,13.628 L1.1
NetL2_1: L2.1 U1.39 | length 1.8
  Top Layer w0.2: U1.39 39.398,13.084 40.077,13.763 L2.1
NetR8_2: R8.2 U3.1 | length 9.2
  Top Layer w0.3: U3.1 20.066,20.066 20.701,19.431 25.004,19.431 25.262,19.689 25.362,19.689 25.512,19.839 R8.2
NetR9_1: R9.1 U3.15 | length 9
  Top Layer w0.3: R9.1 14.745,19.431 18.923,19.431 19.558,18.796 U3.15
NetR10_2: R10.2 U3.3 | length 9.4
  Top Layer w0.3: U3.3 17.241,17.526 19.146,15.621 R10.2
NetR11_1: R11.1 U3.13 | length 9.6
  Top Layer w0.3: R11.1 14.618,17.836 14.943,18.161 19.177,18.161 20.828,16.51 22.637,16.51 22.891,16.256 U3.13
NetR12_2: R12.2 U3.5 | length 2.6
  Top Layer w0.3: R12.2 15.983,14.478 16.491,14.986 U3.5
NetR13_2: R13.2 U3.7 | length 2.4
  Top Layer w0.3: R13.2 16.364,12.319 16.491,12.446 U3.7
nRF_ANT: C10.2 L3.1 U1.24 | length 2.6
  Top Layer w0.148: L3.1 35.342,6.806 C10.2 35.595,8.07 U1.24
nrf_SWC: "nRF DBG.2" U1.20 | length 7.4
  Top Layer w0.15: v2(30.607,9.271) 32.883,9.271 33.445,9.833 33.445,9.845 33.484,9.884 U1.20
  Layer 2 w0.15: 27.286,10.775 27.43,10.632 27.722,10.632 29.083,9.271 v2(30.607,9.271)
nRF_SWD: "nRF DBG.1" U1.19 | length 7.8
  Top Layer w0.15: v2(32.766,9.779) 32.814,9.827 33.013,9.827 33.47,10.284 U1.19
  Layer 2 w0.15: 27.286,12.025 28.546,10.766 29.659,9.652 32.571,9.652 32.698,9.779 v2(32.766,9.779)
VCC: C19.2 C20.2 D2.2 R7.2 U2.3 | length 11.3
  Top Layer w0.5: D2.2 10.98,1.606 10.98,3.601 R7.2 11.062,3.833 12.065,4.836 12.065,6.604 13.418,7.957 13.453,7.957 13.628,8.132 C19.2 13.803,8.207 13.803,7.123 C20.2 13.553,6.343 13.553,5.593 U2.3
pads on no net: ANT.2 U1.2 U1.3 U1.12 U1.13 U1.22 U1.23 U1.31 U1.32 U1.33 U1.34 U1.35 U1.36 U2.5

## Polygon pours and split planes (outlines as drawn)
GND on Top Layer "GND_L01_P003" (solid, pour order 3): 2,22 ccw(c2,20) 0,20 0,0 42,0 ccw(c42,2) 44,2 44,20 ccw(c42,20) 42,22
GND on Layer 1 "GND_L02_P000" (solid, pour order 0): 2,22 ccw(c2,20) 0,20 0,0 42,0 ccw(c42,2) 44,2 44,20 ccw(c42,20) 42,22
GND on Layer 2 "GND_L03_P001" (solid, pour order 1): 2,22 ccw(c2,20) 0,20 0,0 42,0 ccw(c42,2) 44,2 44,20 ccw(c42,20) 42,22
GND on Bottom Layer "GND_L04_P002" (solid, pour order 2): 2,22 ccw(c2,20) 0,20 0,0 42,0 ccw(c42,2) 44,2 44,20 ccw(c42,20) 42,22

## Keep-outs
Keep-Out Layer:
  the board outline again, w0.1

## Other copper
Top Layer:
  pour cut-out: 38.581,8.509 38.581,4.699 42.545,4.699 42.545,8.509
  pour cut-out: 29.21,0 29.21,2.667 34.671,2.667 34.671,0
Layer 1:
  pour cut-out: 29.21,0 29.21,2.667 34.671,2.667 34.671,0
Layer 2:
  pour cut-out: 29.21,0 29.21,2.667 34.671,2.667 34.671,0
Bottom Layer:
  pour cut-out: 29.21,0 29.21,2.667 34.671,2.667 34.671,0

## Silkscreen, mask and mechanical layers (free items; w line width, h text height)
Bottom Overlay:
  text "GND" at 3.047,15.637 h1.8
  text "BTN" at 2.794,13.589 h1.8
  text "LIGHT" at 3.81,11.573 h1.8
  text "LOCK" at 3.429,9.541 h1.8
  text "T15" at 2.412,7.509 h1.8
  text "DN: BLE_DL_BTN_CTRL" at 20.828,5.022 h1.8
  text "Rev: EVT1" at 17.399,3.572 h1.8
  text "HarryL" at 16.637,2.35 h1.8
Top Solder:
  rectangle: 30.353,0 34.671,2.667
Bottom Solder:
  rectangle: 30.353,0 34.671,2.667